# Altium PCB PCB1.PcbDoc
Units mm, origin at the board's own origin, x right, y up, seen from the top; angles counter-clockwise.
Board outline 60.25 x 100.25 mm, 2 copper layers (Top Layer, Bottom Layer); 59 components, 41 nets, 204 pads, 29 vias.
Unrouted connection lines stored in the file: 4.
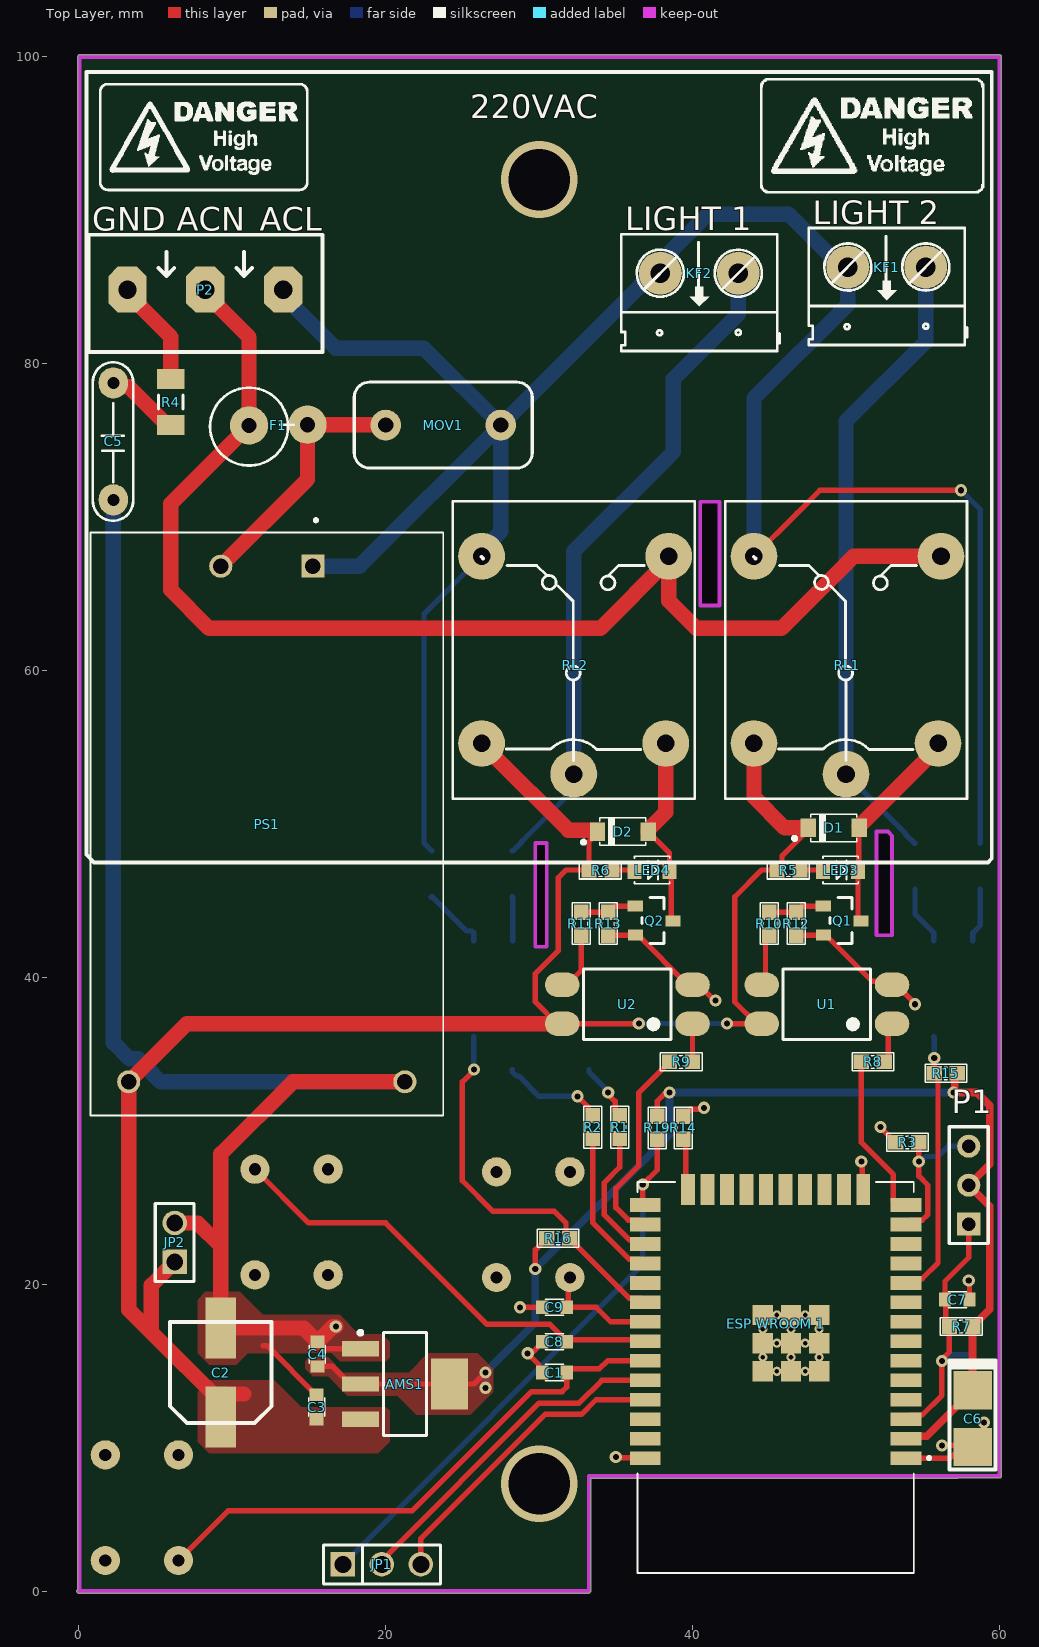
[diagram p0: Top Layer view]
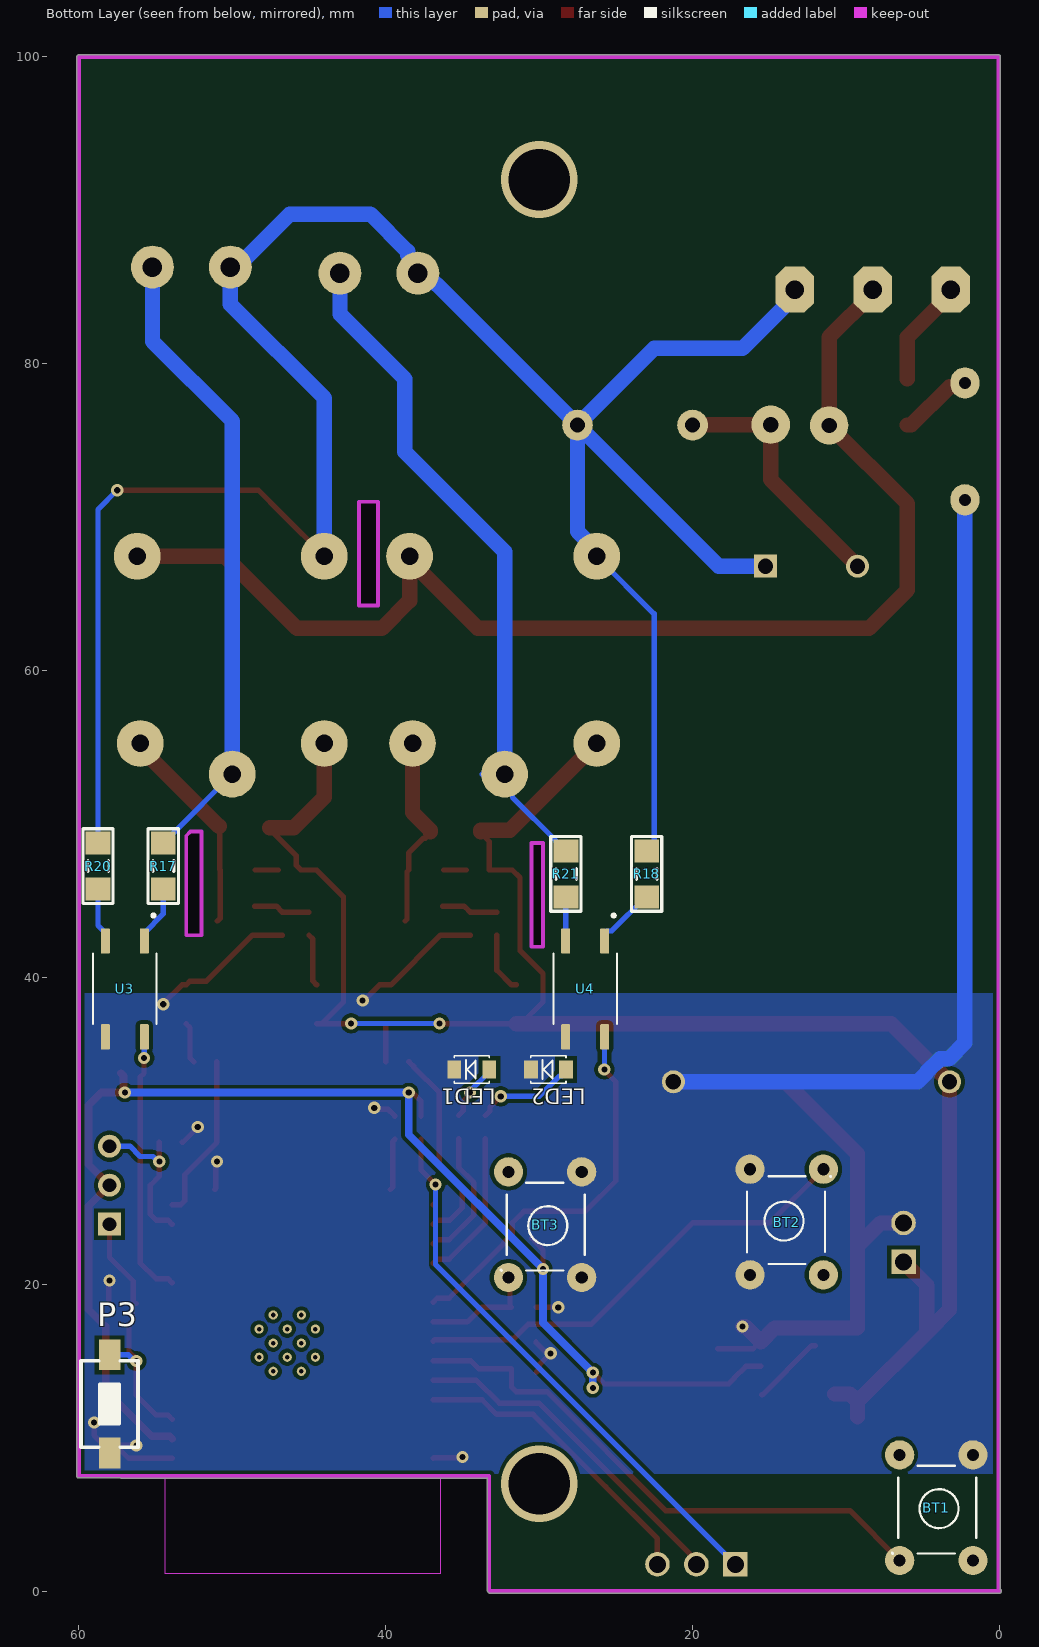
[diagram p1: Bottom Layer view, seen from below]
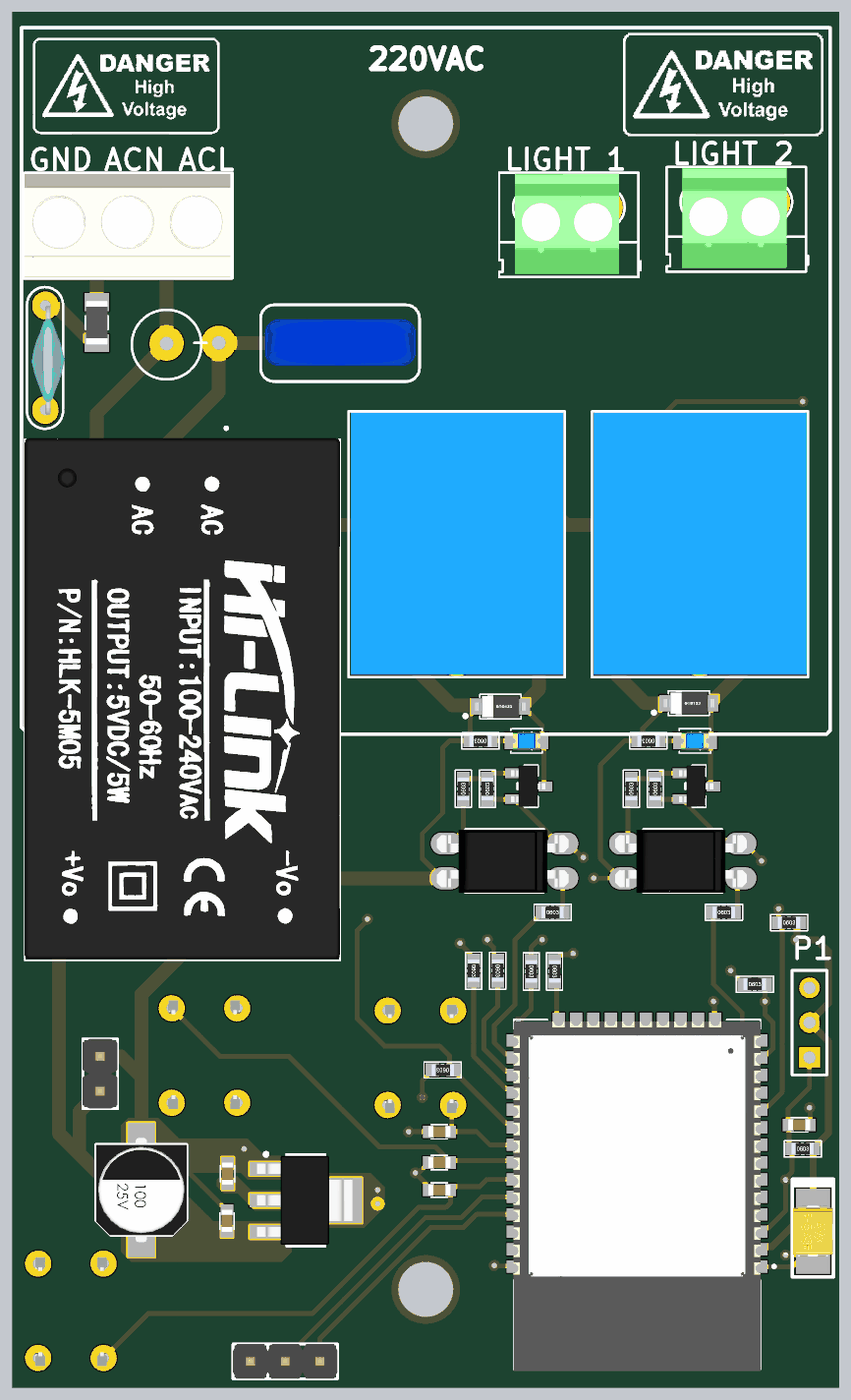
[diagram p2: 3D render of the assembled board from above, using the file's embedded part models]
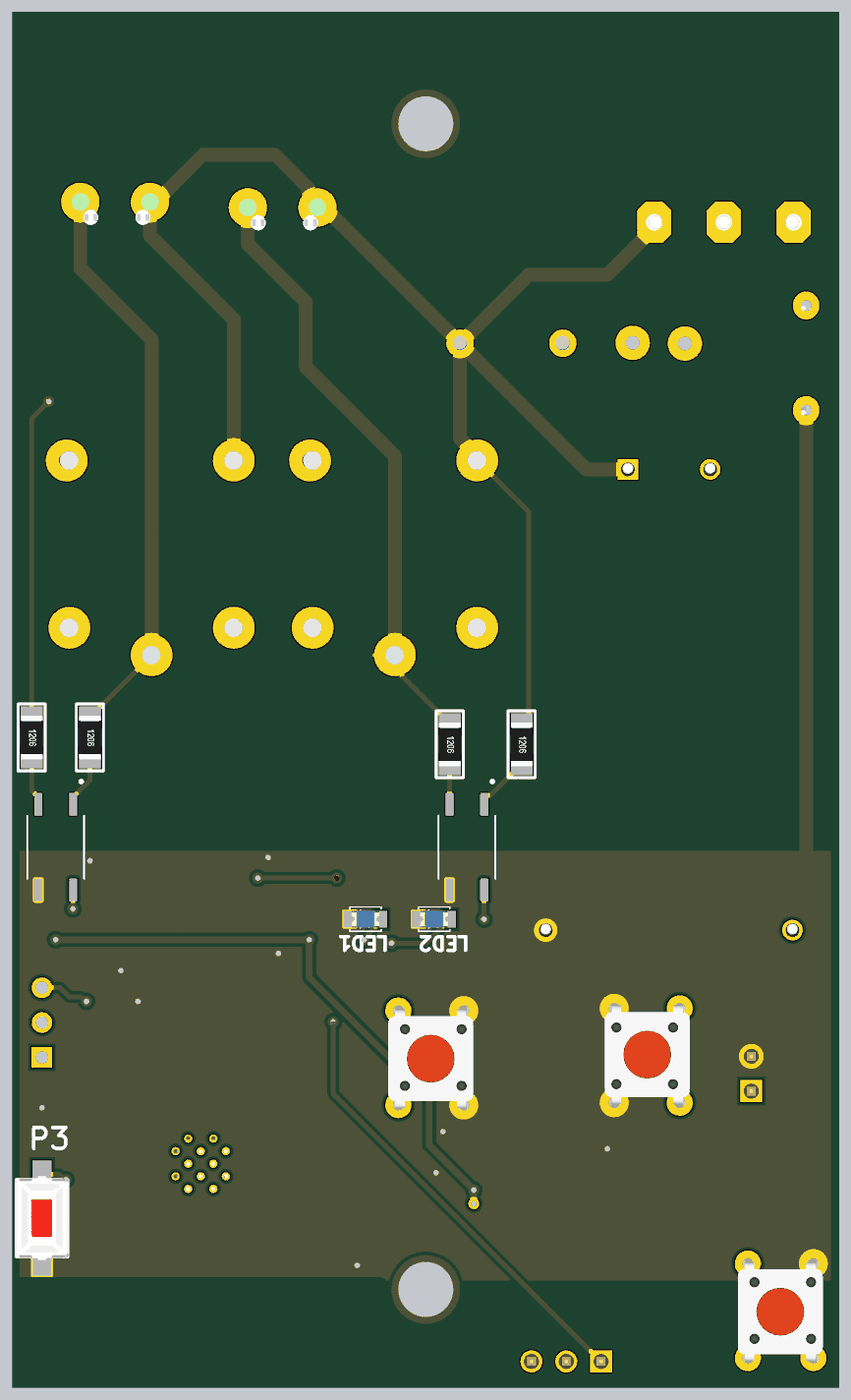
[diagram p3: 3D render of the assembled board from below, using the file's embedded part models]

## Layer stack, top to bottom
Top Solder: solder mask 0.0102, Solder Resist, Dk 3.5
Top Layer: signal copper 0.0356
Dielectric 1: dielectric 0.32, FR-4, Dk 4.8
Bottom Layer: signal copper 0.0356
Bottom Solder: solder mask 0.0102, Solder Resist, Dk 3.5

## Board outline
0,-0.127 33.2,-0.127 ccw(c33.2,0) 33.291,-0.09 33.34,-0.04 ccw(c33.251,0.05) 33.377,0.05 33.377,7.373 57.25,7.373 ccw(c57.25,7.5) 57.29,7.379 59.986,7.379 ccw(c59.996,7.51) 60.127,7.506 60.127,100 ccw(c60,100) 60,100.127 0.061,100.127 ccw(c0.061,100) -0.066,100 -0.066,0.109 ccw(c0,0)
cut-out: 40.5,64.25 40.5,71 41.75,71 41.75,64.25
cut-out: 52,42.75 52,49.5 52.735,49.5 53,49.235 53,42.75
cut-out: 29.75,42 30.5,42 30.5,48.75 29.75,48.75

## Design rules (kind name [scope] priority, off if disabled: settings)
Clearance [All] p1: gap=0.25 ignorepadtopadclearanceinfootprint=FALSE
HoleSize [All] p1: absolutevalues=TRUE maxlimit=10 minlimit=0.025 maxpercent=80.000 minpercent=20.000
MinimumSolderMaskSliver [All] p1: minsoldermaskwidth=0.1
PolygonConnect [All] p1: connectstyle=Direct reliefconductorwidth=0.254 reliefentries=4 polygonreliefangle="90 Angle" airgapwidth=0.254
RoutingVias [All] p1: holewidth=0.5 width=1 viastyle="Through Hole" minholewidth=0.3 minwidth=0.6 maxholewidth=0.4 maxwidth=0.8
SilkToSilkClearance [All] p1: silktosilkclearance=0
SilkToSolderMaskClearance [IsPad] p1: minsilkscreentomaskgap=0 clearancetoexposedcopper=TRUE
SolderMaskExpansion [All] p1: expansion=0.102 istentingtop=FALSE
Width [All] p1: maxlimit=1 minlimit=0.25 preferedwidth=0.35
26 further rules are at their usual default settings.

## Components (designator, comment, footprint, x,y, rotation, side; value= is the part's Value field where it differs from the comment)
AMS1 "AMS1117-3.3V" SOT223 21.25,13.5 r270 top value="AMS1117-3.3V SOT223"
BT1 "Nut Nhan 4 Chan Cam 6x6" "Nut Nhan 4 Chan Cam 6x6" 1.522,8.553 r270 bottom
BT2 "Nut Nhan 4 Chan Cam 6x6" "Nut Nhan 4 Chan Cam 6x6" 16.453,20.947 r90 bottom locked
BT3 "Nut Nhan 4 Chan Cam 6x6" "Nut Nhan 4 Chan Cam 6x6" 27.022,27 r270 bottom locked
C1 "100nF" C0603C/1608MM 31,14.25 r180 top
C2 "100uF" "tu nhom 6.3 (d)" 9.25,14.25 r90 top
C3 "10uF" C0603C/1608MM 15.5,12 r270 top
C4 "22uF" C0603C/1608MM 15.55,15.45 r270 top
C5 "473" CN3 2.25,78.75 r270 top value=0,047uF
C6 "100uF" "tu tantalum smd3528" 58.25,11.25 r270 top
C7 "100nF" C0603C/1608MM 57.25,19 r0 top
C8 "100nF" C0603C/1608MM 31,16.25 r180 top
C9 "100nF" C0603C/1608MM 31,18.5 r180 top
D1 "1N4148" SOD-323 49.25,49.75 r180 top
D2 "1N4148" SOD-323 35.5,49.5 r180 top
"ESP WROOM 1" "ESP32 WROOM 32" ESP32-WROOM-32D 45.415,13.925 r180 top
F1 "5A220V" FUSE_VERTICAL 13,76 r180 top
JP1 "JP 1x3 2.54" "JP 1x3 DT" 17.21,1.75 r0 top
JP2 "JP 1x2 2.54" "JP 1x2 DT" 6.25,21.46 r90 top
KF1 "CON 2 KF301" "Con 2 KF301 5.08" 55.2,86.3 r180 top
KF2 "CON 2 KF301" "Con 2 KF301 5.08" 42.98,85.9 r180 top
LED1 "LED SMD" SM-LED-0805-Blue 33.25,34 r0 bottom
LED2 "LED SMD" SM-LED-0805-Blue 28.25,34 r0 bottom
LED3 "LED SMD" SM-LED-0805-Blue 48.5,47 r0 top
LED4 "LED SMD" SM-LED-0805-Blue 36.214,47 r0 top
MOV1 "10S471K" 10S471K 23.75,76 r0 top value=10D391
P1 "Header 3x1" HDR1X3 58,23.92 r90 top
P2 "Header 3 - M" "Medium - Header 3" 13.33,84.821 r180 top
P3 "=value" "SW 2P SMD" 58.051,12.2 r90 bottom
PS1 "Nguon Hi-Link HLK-5M05" "Nguon HI-LINK 5M05" 12.25,50 r270 top
Q1 "MMBT3904" "SOT 23" 49.75,43.703 r0 top
Q2 "MMBT3904" "SOT 23" 37.5,43.703 r0 top
R1 "1k" "tro smd 0603" 35.25,30.25 r270 top
R2 "1k" "tro smd 0603" 33.5,30.25 r270 top
R3 "1k" "tro smd 0603" 54,29.25 r0 top
R4 "10" R1206B/3216MM 6,77.5 r270 top
R5 "1k" "tro smd 0603" 46.25,47 r180 top
R6 "1k" "tro smd 0603" 34,47 r180 top
R7 "1k" "tro smd 0603" 57.5,17.25 r0 top
R8 "1k" "tro smd 0603" 51.75,34.5 r0 top
R9 "1k" "tro smd 0603" 39.25,34.5 r0 top
R10 "1k" "tro smd 0603" 45,43.5 r90 top
R11 "1k" "tro smd 0603" 32.75,43.5 r90 top
R12 "10k" "tro smd 0603" 46.75,43.5 r90 top
R13 "10k" "tro smd 0603" 34.5,43.5 r90 top
R14 "10k" "tro smd 0603" 39.4,30.2 r270 top
R15 "10k" "tro smd 0603" 56.5,33.75 r0 top
R16 "10k" "tro smd 0603" 31.25,23 r180 top
R17 "390k" "tro smd 1206" 54.5,47.25 r270 bottom
R18 "390k" "tro smd 1206" 23,46.75 r270 bottom
R19 "10k" "tro smd 0603" 37.7,30.2 r270 top
R20 "390k" "tro smd 1206" 58.75,47.25 r270 bottom
R21 "390k" "tro smd 1206" 28.25,46.75 r270 bottom
RL1 "Relay" "Relay 5 Chan SRD" 50,53.25 r90 top
RL2 "Relay" "Relay 5 Chan SRD" 32.25,53.25 r90 top
U1 "OPTO PC817 SMD" SOP4 48.75,38.25 r180 top value=PC817
U2 "OPTO PC817 SMD" SOP4 35.75,38.25 r180 top value=PC817
U3 "OPTO AC IN" LTV-354T 57,39.25 r270 bottom
U4 "OPTO AC IN" LTV-354T 27,39.25 r270 bottom

## Footprints (in the part's own frame and the unit in brackets; to place one, negate y for a bottom-side part, rotate by r counter-clockwise, add the part's x,y. Pads: shape width x height; smd on the part's side, far side on the other; paste and mask are expansions set on the pad)
10S471K [mm]
  round 2 hole 1: 1(-3.75,0) 2(3.75,0)
  silkscreen extent -5.8,-2.8 5.8,2.8, body extent -5.47,-1.65 5.53,1.76, height 11
C0603C/1608MM [mm] "Chip Capacitor, 2-Leads, Body 1.6x0.8mm, IPC High Density"
  rect 0.8x0.9 smd: 1(-0.8,0) 2(0.8,0)
  silkscreen extent -0.59,-0.53 0.61,0.53, body extent -0.8,-0.4 0.8,0.4, height 0.9
CN3 [mil] "Cap np W 0.3"
  oval 80x75 hole 31: 1(0,0) 2(300,0)
  silkscreen extent -53,-53 354,51, body extent 0,-39 315,55, height 419
"Con 2 KF301 5.08" [mil]
  round 110 hole 50: 1(0,0) 2(200,0)
  silkscreen extent -106,-100 300,200, body extent -45,-97 255,190, height 335
ESP32-WROOM-32D [mm]
  rect 2x0.9 smd: 1(-8.5,5.26) 2(-8.5,3.99) 3(-8.5,2.72) 4(-8.5,1.45) 5(-8.5,0.18) 6(-8.5,-1.09) 7(-8.5,-2.36) 8(-8.5,-3.63) 9(-8.5,-4.9) 10(-8.5,-6.17) 11(-8.5,-7.44) 12(-8.5,-8.71) 13(-8.5,-9.98) 14(-8.5,-11.25) 25(8.5,-11.25) 26(8.5,-9.98) 27(8.5,-8.71) 28(8.5,-7.44) 29(8.5,-6.17) 30(8.5,-4.9) 31(8.5,-3.63) 32(8.5,-2.36) 33(8.5,-1.09) 34(8.5,0.18) 35(8.5,1.45) 36(8.5,2.72) 37(8.5,3.99) 38(8.5,5.26)
  rect 0.9x2 smd: 15(-5.715,-12.25) 16(-4.445,-12.25) 17(-3.175,-12.25) 18(-1.905,-12.25) 19(-0.635,-12.25) 20(0.635,-12.25) 21(1.905,-12.25) 22(3.175,-12.25) 23(4.445,-12.25) 24(5.715,-12.25)
  round 0.6 hole 0.3: 39(-2.835,-1.322) 39(-2.835,-3.157) 39(-1.917,-0.405) 39(-1.917,-4.075) 39(-1.917,-2.24) 39(-1,-1.322) 39(-1,-3.157) 39(-0.082,-0.405) 39(-0.082,-2.24) 39(-0.082,-4.075) 39(0.835,-1.322) 39(0.835,-3.157)
  rect 1.33x1.33 smd: 39(-2.835,-0.405) 39(-2.835,-4.075) 39(-2.835,-2.24) 39(-1,-0.405) 39(-1,-2.24) 39(-1,-4.075) 39(0.835,-0.405) 39(0.835,-2.24) 39(0.835,-4.075)
  Keep-Out Layer region: 9,6.45 -9,6.45 -9,12.75 9,12.75
  Keep-Out Layer region: 9,6.45 -9,6.45 -9,12.75 9,12.75
  silkscreen extent -10.1,-12.75 9,12.75, body extent -9,-12.62 9,12.88, height 3.2
FUSE_VERTICAL [mm]
  round 2.5 hole 1: 1(-1.905,-0.025) 2(1.905,0.025)
  silkscreen extent -1.02,-2.43 4.44,2.64
HDR1X3 [mm] "Connector; Header; 3 Position"
  rect 1.5x1.5 hole 0.9: 1(0,0)
  round 1.5 hole 0.9: 2(2.54,0) 3(5.08,0)
  silkscreen extent -1.27,-1.27 6.35,1.27, body extent -1.27,-1.27 6.35,1.27, height 7
"JP 1x2 DT" [mm] "2 pins, 1 row, straight, gold plating"
  rect 1.6x1.6 hole 1.1: 1(0,0)
  round 1.6 hole 1.1: 2(2.54,0)
  silkscreen extent -1.27,-1.27 3.81,1.27, body extent -1.27,-1.27 3.81,1.27, height 8.54
"JP 1x3 DT" [mm]
  rect 1.6x1.6 hole 1.1: 1(0,0)
  round 1.6 hole 1.1: 2(2.54,0) 3(5.08,0)
  silkscreen extent -1.27,-1.27 6.35,1.27, body extent -1.27,-1.27 6.35,1.27, height 8.54
LTV-354T [mm]
  rrect25% 1.66x0.59 smd: 1(-3.125,1.27) 2(-3.125,-1.27) 3(3.125,-1.27) 4(3.125,1.27)
  silkscreen extent -4.88,-2.07 2.3,2.07
"Medium - Header 3" [mm]
  oct 2.5x3 hole 1.2: 1(0,0) 2(5.08,0) 3(10.16,0)
  silkscreen extent -2.54,-3.58 12.7,4.06, body extent -2.42,-3.51 12.58,3.99, height 10
"Nguon HI-LINK 5M05" [mm]
  rect 1.5x1.5 hole 1: 1(-16.8,3)
  round 1.5 hole 1: 2(-16.8,-3) 3(16.8,9) 4(16.8,-9)
  silkscreen extent -19.9,-11.5 19,11.5, body extent -19.08,-11.5 18.92,11.5, height 18.01
"Nut Nhan 4 Chan Cam 6x6" [mil] "SW button 4pin, 250 x250 mil"
  round 75 hole 31: 1(-13,-8) 1(258,-8) 2(-13,-196) 2(258,-196)
  silkscreen extent 15,-215 240,0, body extent -31,-225 281,19, height 276
R1206B/3216MM [mm] "Chip Resistor, 2-Leads, Body 3.2x1.6mm, IPC Medium Density"
  rect 1.3x1.8 smd: 1(-1.5,0) 2(1.5,0)
  silkscreen extent -0.45,-0.8 0.45,0.8, body extent -1.6,-0.8 1.6,0.8, height 0.6
"Relay 5 Chan SRD" [mil] "Relay SPDT, 5 pin, 10A,W 650mil, L 800mil, H 800mil"
  round 120 hole 45: 1(0,0) 2(559.06,236.22) 3(559.06,-243.78) 4(78.74,-236.22) 5(78.74,236.22)
  silkscreen extent -63,-311 700,310, body extent -55,-306 697,304, height 602
SM-LED-0805-Blue [mm]
  rect 0.9x1.2 smd: 1(0,0) 2(2.286,0)
  silkscreen extent 0,-0.89 2.29,0.89, body extent 0.13,-0.63 2.15,0.63, height 1.1
SOD-323 [mm]
  rect 1x1.2 smd: 1(-1.604,0) 2(1.7,0)
  silkscreen extent -1.45,-0.9 2.7,0.9, body extent -1.8,-0.8 1.9,0.8, height 1.27
SOP4 [mm]
  oval 2.25x1.6 smd: 1(-4.25,1.27) 2(-4.25,-1.27) 3(4.25,-1.27) 4(4.25,1.27)
  silkscreen extent -2.85,-2.3 2.85,2.3, body extent -4.67,-2.29 4.93,2.31, height 3.6
SOT223 [mm]
  rect 1x2.4 smd: 1(-2.3,-2.9) 2(0,-2.9) 3(2.3,-2.9)
  rect 3.3x2.4 smd: 4(0,2.9)
  silkscreen extent -3.47,-3.02 3.35,1.4, body extent -3.25,-3.56 3.25,3.4, height 1.68
"SOT 23" [mm]
  rect 1x0.7 smd: 1(-1.225,0.945) 2(-1.22,-0.945) 3(1.225,-0.025)
  silkscreen extent -0.8,-1.5 0.65,1.5, body extent -1.28,-1.51 1.22,1.49, height 1.06
"SW 2P SMD" [mm]
  rect 2x1.4 smd: 1(-3.2,-0.051) 2(3.2,-0.051)
  silkscreen extent -2.82,-1.91 2.82,1.8, body extent -3.05,-1.9 3.05,1.8, height 2.5
"tro smd 0603" [mm] "Chip Capacitor, 2-Leads, Body 1,60x0,80mm, IPC Medium Density"
  rect 1x0.95 smd mask+0.076: 1(-0.75,0) 2(0.75,0)
  silkscreen extent -1.35,-0.58 1.37,0.58, body extent -0.82,-0.42 0.82,0.43, height 0.44
"tro smd 1206" [mm]
  rect 1.5x1.6 smd: 1(-1.5,0) 2(1.5,0)
  silkscreen extent -2.44,-0.99 2.44,0.99, body extent -1.6,-0.8 1.6,0.8, height 0.6
"tu nhom 6.3 (d)" [mm]
  rect 4x2 smd: 1(-2.9,0) 2(2.9,0)
  silkscreen extent -3.3,-3.3 3.3,3.3, body extent -3.8,-3.3 3.8,3.3, height 8
"tu tantalum smd3528" [mm]
  rect 2.5x2.5 smd: 1(-1.85,0) 2(1.85,0)
  silkscreen extent -3.78,-1.5 3.33,1.5, body extent -1.85,-1.46 1.85,1.47, height 2.03

## Part data
AMS1: library part "AMS1117 SMD", "Dán", Chung_Loai=Dán, Don_Vi=Con, Ma_Hang=MH000596
BT1 BT2 BT3: "Nut Nhan 4 Chan 6x6mm", Ma_Hang=MH004584, Ten="Nút Nhấn 4 Chân 6x6x5MM DIP"
C1 C7 C8 C9: library part "CAP CER 100nF 16V 5% X7R 0603", "Cap Ceramic 0.1uF 16V X7R 5% SMD 0603 125C T/R", Case Code (Imperial)=0603, Case Code (Metric)=1608, Dielectric=X7R, Manufacturer=Yageo, Manufacturer Part Number=CC0603JRX7R7BB104, Max Operating Temperature=125°C, Min Operating Temperature=-55°C, Supplier Part Number 1=311-1776-1-ND, Tolerance=5%, Voltage Rating=16V, Capacitance=100nF, Case/Package=0603, ComponentLink1Description=https://www.verical.com/server-webapp/html/getDatasheet?partID=403543&src-supplier=Verical, ComponentLink1URL=https://www.verical.com/server-webapp/html/getDatasheet?partID=403543&src-supplier=Verical, Depth=0.8mm, Halogen Free="Halogen Free", Lead Free="Lead Free", Length=1.6mm, Mount="Surface Mount", Number of Pins=2, Packaging="Tape and Reel", Pricing 1="1=0.1, 10=0.077, 50=0.042, 100=0.0343, 500=0.02448, 1000=0.01923 (USD)", Radiation Hardening=No, RoHS Compliant=Yes, Series=CC, Stock 1=333951, Supplier 1=Digi-Key, Thickness=0.035inch, Voltage Rating (DC)=16V, Width=0.031inch
C2: library part "Tu Nhom 100uF 16V", "Dán", Chung_Loai=Dán, Don_Vi=Con, Ma_Hang=MH002219, So_Chan=2, Ten_Linh_Kien="Tụ Nhôm 100uF 16V 6.3x5.4MM"
C3 C4: library part "CAP CER 10uF 16V X7R 0603", "CAP CER 0603 10uF 16V X7R 10%"
C5: library part CN3, "Cap np W0.3", Copyright=VanDungEvn
C6: library part "Tu tantalum 100uF 6.3V SMD3528", "Dán", Chung_Loai=Dán, Don_Vi=Con, Ma_Hang=MH007595, So_Chan=2, Ten_Linh_Kien="Tụ tantalum 107J-100uF 6.3V SMD3528"
D1 D2: library part "DIODE GEN PURP 75V 150MA DO35", "DIODE GEN PURP 75V 150MA DO35"
F1: library part Fuse, "FUSE 220V 5A RADIAL", Breaking Capacity @ Rated Voltage=50A, Current Rating (Amps)=5A, DC Cold Resistance="0.03 Ohms", Package / Case=TH2, Voltage - Rated=250V, Category=FUSE, Melting I²t=0.919, PROCESS_TYPE=MA, Response Time=24S, Unit=PCS
JP1: library part "JP 1x3 2.54 Duc Thang", "Cắm", Chung_Loai=Cắm, Don_Vi=Con, Ma_Hang=MH000903, Ten_Linh_Kien="Jump Đơn Đực 2.54MM 1x40P Thẳng 11MM"
JP2: library part "JP 1x2 2.54 Duc Thang", "Cắm", Chung_Loai=Cắm, Don_Vi=Con, Ma_Hang=MH000903, Ten_Linh_Kien="Jump Đơn Đực 2.54MM 1x40P Thẳng 11MM"
KF1 KF2: "Cắm", Chung_Loai=Cắm, Don_Vi=Con, Ma_Hang=MH000987, Ten_Linh_Kien="CON 2 KF301-2P 5.08MM Xanh Dương"
LED1 LED2 LED3 LED4: library part "LED SMD 0805"
MOV1: library part "MOV 10S471K", "VARISTOR 470V 2.5KA DISC 10MM", MANUFACTURER1=Bourns, MANUFACTURER1_PART#=MOV-10D391K, MANUFACTURER2_PART#="10D391K 390V 10mm", Category=VARISTOR, LOH_CODE=CLA1220, MANUFACTURER2=http://linhkienchatluong.vn/tu-chong-set---varistor/tu-chong-set-varistor-10d391k-390v-10mm_sp1161_ct1335.aspx
P1: "Header, 3-Pin, pitch 2.54mm", Solder=WAVE
P2: "Header, 3-Pin, Medium", LatestRevisionDate=17-Jul-2002, LatestRevisionNote="Re-released for DXP Platform.", Publisher="Altium Limited"
P3: library part "Button 2 SMD", "SMD Mini Push Button Switch 2 Pin 3x6x2.7mm", MPN="SMD Mini Push Button 2 SMD", Link=https://ram-e-shop.com/product/press2pin-smd/
PS1: "AC DC 220V to 5V 5W 5Watt Isolated Switching Step-Down Power Supply Module Converter", Package="Package Analog Devices", Availability=Unavailable, MF=Hi-link, MP=HLK-5M05, Price=None, SnapEDA_Link=https://www.snapeda.com/parts/HLK-5M05/Hi-link/view-part/2758659/?ref=snap
Q1 Q2: library part "TRANS NPN 40V 0.2A SOT23", "Bipolar (BJT) Transistor NPN 40 V 200 mA 300MHz 350 mW Surface Mount SOT-23", Case/Package=TO-126-3, Collector Emitter Breakdown Voltage=30V, Collector-emitter Voltage-Max=500mV, Manufacturer=MCC, Manufacturer Part Number=2SD882-GR-BP, Max Collector Current=3A, Max Operating Temperature=150°C, Max Power Dissipation=1.25W, Min Operating Temperature=-55°C, Supplier Part Number 1=2SD882-GR-BP-ND, Transition Frequency=50MHz, ComponentLink1Description=https://media.digikey.com/pdf/Data%20Sheets/Micro%20Commercial%20PDFs/2SD882-x.pdf?src-supplier=Digi-Key, ComponentLink1URL=https://media.digikey.com/pdf/Data%20Sheets/Micro%20Commercial%20PDFs/2SD882-x.pdf?src-supplier=Digi-Key, Mount="Through Hole", Packaging=Bulk, Series=-, Stock 1=0, Supplier 1=Digi-Key
R1 R2 R3 R5 R6 R7 R8 R9 R10 R11: library part "Tro 0603 1% 1k", "Dán", Chung_Loai=Dán, Don_Vi=Con, Ma_Hang=MH006334, So_Chan=2, Ten_Linh_Kien="Trở 0603 1% 1k"
R4: library part "RES SMD 3.3M OHM 5% 1/4W 1206", "Surface Mount Thick Film Resistor, RC Series, 3.3Mohm, 100 mW, - 5%, 50 V, 1206", Case Code (Imperial)=1206, Case Code (Metric)=3216, Manufacturer=Yageo, Manufacturer Part Number=RC1206JR-073M3L, Max Operating Temperature=155°C, Max Power Dissipation=250mW, Min Operating Temperature=-55°C, Package Quantity=5000, Resistance=3.3MR, Resistor Type="Thick Film", Supplier Part Number 1=311-3.3MERCT-ND, Temperature Coefficient=100ppm/°C, Tolerance=5%, Voltage Rating=200V, Case/Package=1206, ComponentLink1Description=http://www.yageo.com.tw/exep/pages/download/literatures/PYu-R_INT-thick_7.pdf?src-supplier=Digi-Key, ComponentLink1URL=http://www.yageo.com.tw/exep/pages/download/literatures/PYu-R_INT-thick_7.pdf?src-supplier=Digi-Key, Construction=Rectangular, Depth=1.6mm, Features="Moisture Resistant", Height=0.026inch, Lead Free="Lead Free", Length=0.122inch, Military Standard=Not, Number of Terminations=2, Packaging="Tape and Reel", Power Rating=250mW, Pricing 1="1=0.1, 10=0.063, 100=0.0258, 1000=0.01158, 2500=0.01005 (USD)", RoHS Compliant=Yes, Series=RC, Stock 1=9900, Supplier 1=Digi-Key, Termination=SMD/SMT, Voltage Rating (DC)=200V, Width=0.063inch
R12 R13 R14 R15 R16 R19: library part "Tro 0603 1% 10k", "Dán", Chung_Loai=Dán, Don_Vi=Con, Ma_Hang=MH006333, So_Chan=2, Ten_Linh_Kien="Trở 0603 1% 10k"
R17 R18 R20 R21: library part "Tro 1206 1% 390k", "Dán", Chung_Loai=Dán, Don_Vi=Con, Ma_Hang=MH005898, So_Chan=2, Ten_Linh_Kien="Trở 1206 1% 390k"
RL1 RL2: library part "Relay 5 Chan SRD", "Relay 5 Chan", Ma_Hang=MH009374, Ten="Relay 5V10A SRD-05VDC-SL-C Chính Hãng"
U1 U2: "Single Opto"
U3 U4: library part LTV-354T, "AC INPUT Opto"

## Via types
v1: diameter 0.8, hole 0.4, Top Layer to Bottom Layer, tented both sides, 26 vias
v2: diameter 5, hole 4, Top Layer to Bottom Layer, tented both sides, 2 vias
v3: diameter 0.8, hole 0.4, Top Layer to Bottom Layer, 1 vias

## Nets (pads, with @x,y where several pads share a name; then routed paths per layer and width w, separated by ;. In a path a pad name is that pad's centre, name@x,y a point inside that pad or via, vN(x,y) a via of type N, cw(c..) or ccw(c..) an arc to the next point about the centre after c; other vN are vias at no path point)
+3.3V_VIN: "ESP WROOM 1.2" AMS1.2 AMS1.4 C4.2 C6.1 P1.2 R7.2 R15.2 R16.2 R19.1 | length 88.7
  Top Layer w0.35: C4.2 16.525,14.65 17.325,13.85 17.325,13.825 17.65,13.5 AMS1.2 AMS1.4 25.75,13.5 v1(26.5,14.25) ; v1(29.75,21) 29.75,22.25 30.175,22.675 30.175,22.7 30.475,23 R16.2 ; R19.1 37.7,31.95 38.164,32.414 38.414,32.414 v1(38.5,32.5)
  Top Layer w0.5: 53.915,9.935 54.085,10.105 55.255,10.105 C6.1 R7.2 58.275,17.25 58.5,17.475 58.5,17.5 59.373,18.373 59.373,25.087 P1.2 59.373,27.833 59.373,31.652 58.525,32.5 v1(57,32.5) 57.086,32.586 57.086,33.586 R15.2
  Bottom Layer w0.5: v3(26.5,13.25) v1(26.5,14.25) 29.75,17.5 v1(29.75,21) 38.5,29.75 v1(38.5,32.5) v1(57,32.5)
+5V_VIN: AMS1.3 C2.1 C3.2 D1.2 D2.2 JP2.1 PS1.4 R5.2 R6.2 RL1.5 RL2.5 U1.4 U2.4 | length 122.6
  Top Layer w0.35: U2.4@31.175,36.98 29.75,38.405 29.75,40.25 31.25,41.75 31.25,46.5 31.75,47 R6.2 33.25,48.85 33.8,49.4 D2.2 ; U2.4 36.48,36.98 v1(36.5,37) ; v1(42.25,37) 42.26,36.99 44.165,36.99 42.75,38.405 42.75,45.25 44.5,47 R5.2 45.525,47 45.825,47.3 45.825,47.925 47.55,49.65 D1.2 ; U1.4@44.175,36.98 U1.4
  Top Layer w1: JP2.1 4.728,19.938 4.728,16.872 ; C2.1 C2.1@9.25,12.35 ; 10.75,12.85 9.75,12.85 C2.1@9.25,12.35 ; RL2.5@26.903,54.597 31.9,49.6 33.8,49.6 D2.2 ; U2.4 31.175,36.98 7.03,36.98 PS1.4 3.25,18.35 4.728,16.872 ; RL1.5 44,51.75 46,49.75 D1.2 ; 4.728,16.872 C2.1@9.25,12.35
  Bottom Layer w0.35: v1(36.5,37) v1(42.25,37)
ACL: KF1.2 KF2.2 MOV1.2 P2.1 PS1.1 R18.1 R20.1 RL1.2 RL2.2 | length 154.5
  Top Layer w0.35: RL1.2 46.797,70.247 48.3,71.75 v1(57.5,71.75)
  Bottom Layer w0.35: R18.1 22.5,48.75 22.5,63.7 RL2.2 ; v1(57.5,71.75) 58.75,70.5 R20.1
  Bottom Layer w1: P2.1 13.33,84.42 16.75,81 22.5,81 MOV1.2 ; PS1.1 18.3,66.8 MOV1.2 ; RL2.2 26.25,67.81 27.5,69.06 MOV1.2 ; RL1.2 44,77.75 50.12,83.87 KF1.2 49.7,86.3 46.25,89.75 41,89.75 38.573,87.323 38.573,87.059 37.9,86.385 KF2.2 37.415,85.9 36.616,85.102 36.602,85.102 MOV1.2
ACN: F1.2 P2.2 RL1.3 RL2.3 | length 81.8
  Top Layer w1: P2.2 8.25,84.571 11.095,81.726 F1.2 6,70.88 6,65.25 8.5,62.75 34,62.75 38.442,67.192 RL2.3 38.442,64.558 40.25,62.75 45.785,62.75 50.485,67.45 RL1.3
BLE_MESH: "ESP WROOM 1.27" R1.2 | length 8.8
  Top Layer w0.35: R1.2 35.25,27.628 34.25,26.628 34.25,24.519 35.859,22.91 36.64,22.91 36.915,22.635
BUTTON01: "ESP WROOM 1.32" BT2.2 C8.1 | length 30.2
  Top Layer w0.35: BT2.2@11.475,27.5 14.975,24 20,24 26.612,17.388 30.712,17.388 31.8,16.3 C8.1 ; C8.1@31.8,16.5 31.908,16.392 36.807,16.392 36.915,16.285
BUTTON02: "ESP WROOM 1.31" BT3.2 C9.1 | length 7.5
  Top Layer w0.35: BT3.2@32,20.447 31.9,20.347 31.9,18.6 C9.1 33.723,18.5 34.668,17.555 36.915,17.555
C/S_MODE: "ESP WROOM 1.13" P1.3 R3.2 | length 10.3
  Top Layer w0.35: 53.915,23.905 54.19,24.18 54.971,24.18 55.34,24.549 55.34,26.454 54.75,27.044 v1(54.75,28) R3.2
  Bottom Layer w0.35: v1(54.75,28) 54.847,28 55.18,28.333 56,28.333 56.667,29 P1.3
CON1: KF1.1 R17.1 RL1.1 | length 41.6
  Bottom Layer w0.35: RL1.1 53.875,49.375 53.875,49.325 54.45,48.75 R17.1
  Bottom Layer w1: RL1.1 50,76.25 55.2,81.45 KF1.1
CON2: KF2.1 R21.1 RL2.1 | length 45.6
  Top Layer w1: RL2.1 RL2.1@32.5,53.5
  Bottom Layer w0.35: R21.1 28.3,48.25 28.875,48.825 28.875,48.875 31.734,51.734 31.734,52.734 RL2.1 RL2.1@33.7,53.25
  Bottom Layer w1: RL2.1 32.25,67.75 38.75,74.25 38.75,79 42.98,83.23 KF2.1
EN: "ESP WROOM 1.3" C7.1 P1.1 P3.2 R7.1 | length 17
  Top Layer w0.35: 53.915,11.205 54.19,11.48 54.971,11.48 56.25,12.759 56.25,15.122 56.731,15.603 R7.1@56.731,17.242 ; C7.1@56.25,18.75 56.475,18.75 56.5,18.725 56.5,17.5 R7.1 ; C7.1 56.45,20.2 58,21.75 P1.1
  Bottom Layer w0.35: v1(56.25,15) 56.372,15 56.772,15.4 P3.2
GND: "ESP WROOM 1.1" "ESP WROOM 1.15" "ESP WROOM 1.38" AMS1.1 BT1.1 BT2.1 BT3.1 C1.2 C2.2 C3.1 C4.1 C5.2 C6.2 C7.2 C8.2 C9.2 JP2.2 LED1.2 LED2.2 P3.1 PS1.3 Q1.2 Q2.2 R3.1 R12.1 R13.1 R14.1 U1.2 U2.2 U3.3 U4.3 | length 139.2
  Top Layer w0.35: 12,16 12.25,16 15.45,12.8 C3.1 ; C4.1 15.6,16.25 16.05,15.8 AMS1.1 ; v1(28.75,18.5) C9.2 ; C1.2 29.975,14.475 29.975,14.775 v1(29.25,15.5) 29.336,15.586 29.586,15.586 30.2,16.2 C8.2 ; R13.1 34.504,42.754 36.276,42.754 Q2.2 36.43,42.758 39.669,39.52 40.403,39.52 41.423,38.5 v1(41.5,38.5) ; v1(35,8.75) 35.043,8.708 36.872,8.708 36.915,8.665 ; R14.1 39.4,30.975 39.7,31.275 39.725,31.275 39.864,31.414 40.664,31.414 v1(40.75,31.5) ; R12.1 46.754,42.754 48.526,42.754 Q1.2 48.68,42.758 51.679,39.759 52.761,39.759 U1.2 53.277,39.52 54.5,38.297 v1(54.5,38.25) ; v1(51,28) 51.065,27.935 51.065,26.24 51.13,26.175 ; v1(52.25,30.25) 52.25,30.225 53.225,29.25 R3.1 ; 53.915,8.665 56.765,8.665 C6.2@57.5,9.4 ; v1(56.25,9.5) 57.4,9.5 C6.2@57.5,9.4 ; v1(58,20.25) 58.05,20.2 C7.2 ; v1(59,11) 59,10.15 C6.2 C6.2@57.5,9.4
  Top Layer w1: JP2.2 7.75,24 9.25,22.5 ; v1(16.75,17.25) 16.55,17.25 C4.1 14.65,17.15 C2.2 9.25,22.5 ; PS1.3 13.95,33.2 9.25,28.5 9.25,22.5
  Bottom Layer w1: C5.2 2.25,35.75 3.3,34.7 3.871,34.7 4.75,33.821 4.75,33.786 5.336,33.2 PS1.3
GND_EARTH: P2.3 R4.1 | length 7
  Top Layer w1: P2.3 3.17,84.571 6,81.74 R4.1
IO0: "ESP WROOM 1.25" JP1.1 R19.2 | length 37.6
  Top Layer w0.35: 36.915,25.175 36.75,25.34 v1(36.75,26.5) 37.7,27.45 R19.2
  Bottom Layer w0.35: JP1.1 36.75,21.29 v1(36.75,26.5)
NetC5_1: C5.1 R4.2 | length 4.9
  Top Layer w1: C5.1 2.487,78.513 3.237,78.513 5.75,76 R4.2
NetD1_1: D1.1 LED3.2 Q1.3 RL1.4 | length 13.8
  Top Layer w0.35: D1.1@50.854,49.85 50.82,49.816 50.82,47.034 LED3.2 50.786,43.853 50.961,43.678 Q1.3
  Top Layer w1: D1.1@50.854,49.85 56,54.996 RL1.4
NetD2_1: D2.1 LED4.2 Q2.3 RL2.4 | length 12.2
  Top Layer w0.35: D2.1 37.104,49.4 37.429,49.075 37.529,49.075 38.5,48.104 LED4.2 38.613,46.887 38.613,43.791 Q2.3
  Top Layer w1: D2.1 37.104,49.6 38.25,50.746 RL2.4@38.25,54.721
"NetESP WROOM 1_24": "ESP WROOM 1.24" R14.2 | length 3.4
  Top Layer w0.35: R14.2 39.55,29.3 39.55,26.325 39.7,26.175
NetF1_1: F1.1 MOV1.1 PS1.2 | length 16.7
  Top Layer w1: PS1.2 14.905,72.455 F1.1 14.918,76.013 19.987,76.013 MOV1.1
NetLED1_1: LED1.1 R1.1 | length 3.8
  Top Layer w0.35: v1(34.5,32.5) 34.5,32.378 34.95,31.928 34.95,31.3 R1.1
  Bottom Layer w0.35: LED1.1 33.25,33.85 34.5,32.6 v1(34.5,32.5)
NetLED2_1: LED2.1 R2.1 | length 6.7
  Top Layer w0.35: v1(32.5,32.25) 33.2,31.55 33.2,31.3 R2.1
  Bottom Layer w0.35: LED2.1 28.25,33.85 28.525,33.575 28.675,33.575 30,32.25 v1(32.5,32.25)
NetLED3_1: LED3.1 R5.1 | length 1.5
  Top Layer w0.35: R5.1 LED3.1
NetLED4_1: LED4.1 R6.1 | length 1.5
  Top Layer w0.35: R6.1 LED4.1
NetQ1_1: Q1.1 R10.2 R12.2 | length 3.7
  Top Layer w0.35: R10.2 R12.2 46.75,44.275 47.123,44.648 Q1.1
NetQ2_1: Q2.1 R11.2 R13.2 | length 3.7
  Top Layer w0.35: R11.2 R13.2 34.5,44.275 34.8,44.575 34.825,44.575 34.898,44.648 Q2.1
NetR8_2: R8.2 U1.1 | length 2.7
  Top Layer w0.35: R8.2 52.75,34.75 52.75,36.73 U1.1
NetR9_2: R9.2 U2.1 | length 2.5
  Top Layer w0.35: R9.2 U2.1
NetR10_1: R10.1 U1.3 | length 3.4
  Top Layer w0.35: U1.3 44.75,39.77 44.75,42.5 R10.1
NetR11_1: R11.1 U2.3 | length 3.9
  Top Layer w0.35: U2.3 31.801,39.52 32.75,40.469 R11.1
NetR17_2: R17.2 U3.1 | length 3.9
  Bottom Layer w0.35: R17.2 54.5,44.14 55.73,42.91 U3.1
NetR18_2: R18.2 U4.1 | length 4.3
  Bottom Layer w0.35: R18.2@22.98,45.23 R18.2 23.05,45.25 25.27,43.03 25.61,43.03 25.73,42.91 U4.1
NetR20_2: R20.2 U3.2 | length 3.6
  Bottom Layer w0.35: U3.2 58.27,42.91 58.75,43.39 R20.2
NetR21_2: R21.2 U4.2 | length 2.9
  Bottom Layer w0.35: R21.2 28.27,45.23 U4.2
RELAY01: "ESP WROOM 1.14" R8.1 | length 10.9
  Top Layer w0.35: R8.1 51,29.25 53.09,27.16 53.09,25.45 53.365,25.175 53.915,25.175
RELAY02: "ESP WROOM 1.26" R9.1 | length 13.3
  Top Layer w0.35: 36.915,23.905 36.64,24.18 35.82,24.18 35,25 35,26.25 36.5,27.75 36.5,32.5 38.175,34.175 38.175,34.2 38.475,34.5 R9.1
RESET_CONFIG: "ESP WROOM 1.33" BT1.2 C1.1 | length 36.5
  Top Layer w0.35: BT1.2@6.5,2 9.75,5.25 21.75,5.25 29.5,13 31.5,13 31.8,13.3 31.8,14.5 33.938,14.5 34.452,15.015 36.915,15.015
RX0: "ESP WROOM 1.34" JP1.2 | length 22.3
  Top Layer w0.35: JP1.2 19.75,2 30,12.25 32.592,12.25 34.087,13.745 36.915,13.745
TX0: "ESP WROOM 1.35" JP1.3 | length 20
  Top Layer w0.35: JP1.3 22.29,3.427 25.659,6.795 30.388,11.525 32.764,11.525 33.714,12.475 36.915,12.475
V_RELAY1: "ESP WROOM 1.10" R15.1 U3.4 | length 17.5
  Top Layer w0.35: 53.915,20.095 54.19,20.37 54.971,20.37 56,21.399 56,33.5 R15.1 v1(55.75,34.75)
  Bottom Layer w0.35: U3.4 55.74,36.115 55.74,34.76 v1(55.75,34.75)
V_RELAY2: "ESP WROOM 1.30" R16.1 U4.4 | length 25.4
  Top Layer w0.35: v1(25.75,34) 25.75,33.944 25,33.194 25,26.75 27,24.75 31,24.75 31.75,24 31.75,23.25 R16.1 32.025,23 32.325,22.7 32.325,22.634 35.859,19.1 36.64,19.1 36.915,18.825
  Bottom Layer w0.35: U4.4 25.74,36.115 25.74,34.01 v1(25.75,34)
WIFI_STATUS: "ESP WROOM 1.28" R2.2 | length 10
  Top Layer w0.35: R2.2 33.5,23.999 35.859,21.64 36.64,21.64 36.915,21.365
pads on no net: "ESP WROOM 1.4" "ESP WROOM 1.5" "ESP WROOM 1.6" "ESP WROOM 1.7" "ESP WROOM 1.8" "ESP WROOM 1.9" "ESP WROOM 1.11" "ESP WROOM 1.12" "ESP WROOM 1.16" "ESP WROOM 1.17" "ESP WROOM 1.18" "ESP WROOM 1.19" "ESP WROOM 1.20" "ESP WROOM 1.21" "ESP WROOM 1.22" "ESP WROOM 1.23" "ESP WROOM 1.29" "ESP WROOM 1.36" "ESP WROOM 1.37" "ESP WROOM 1.39"
copper on no net:
  other v2: 30,7 30,92

## Polygon pours and split planes (outlines as drawn)
GND on Top Layer "GND_L01_P003" (solid, pour order 3): 8.25,19.5 10.5,19.5 12,18 17,18 18.25,16.75 19.75,16.75 20.25,16.25 20.25,15.25 20,15 17,15 16.5,15.5 11,15.5 10.25,14.75 8.5,14.75 7.75,15.5 7.75,19
+3.3V_VIN on Top Layer "+3.3V_VIN_L01_P002" (solid, pour order 2): 15,15.25 16.25,15.25 17.25,14.25 21.5,14.25 22.75,15.5 26,15.5 27,14.5 27,13 25.5,11.5 22,11.5 20.75,12.75 17.5,12.75 16.25,14 15.25,14 14.75,14.5 14.75,15
+5V_VIN on Top Layer "+5V_VIN_L01_P001" (solid, pour order 1): 20,12 14.5,12 12.75,13.75 8.5,13.75 7.75,13 7.75,9.75 8.5,9 19.5,9 20.25,9.75 20.25,11.75
GND on Bottom Layer "GND_L02_P000" (solid, pour order 0): 0.061,38.985 60,38.985 60,7.664 0.275,7.664 0.061,7.877

## Keep-outs
Keep-Out Layer:
  lines w0.254: 0,0 33.2,0 33.25,0.05 33.25,5.75 33.25,7.5 57.25,7.5 57.256,7.506 59.256,7.506 59.986,7.506 ; 0.061,0 0.061,100 60,100 60,7.506 ; 29.75,42 29.75,48.75 30.5,48.75 30.5,42 29.75,42 ; 40.5,64.25 40.5,71 41.75,71 41.75,64.25 40.5,64.25 ; 52,42.75 52,49.5 52.735,49.5 53,49.235 53,42.75 52,42.75

## Silkscreen, mask and mechanical layers (free items; w line width, h text height)
Top Overlay:
  drawing of 48 lines, arcs and shapes, not listed
  text "220VAC" at 25.5,96 h1.52
  text "LIGHT 2" at 47.834,89.094 h1.52
  text "LIGHT 1" at 35.614,88.694 h1.52
  text "GND" at 0.884,88.656 h1.52
  text "ACN" at 6.381,88.656 h1.52
  text "ACL" at 11.787,88.656 h1.52

## Text inside footprints (layer, text, board x,y; h text height)
"ESP WROOM 1": Mechanical 13 "ANTENNA" at 51.415,4.925 h1 r180